# Altium PCB Faceplate_Display.PcbDoc
Units mil, origin at the board's own origin, x right, y up, seen from the top; angles counter-clockwise.
Board outline 8164 x 1503 mil, 2 copper layers (Top Layer, Bottom Layer); 31 components, 36 nets, 198 pads, 113 vias.
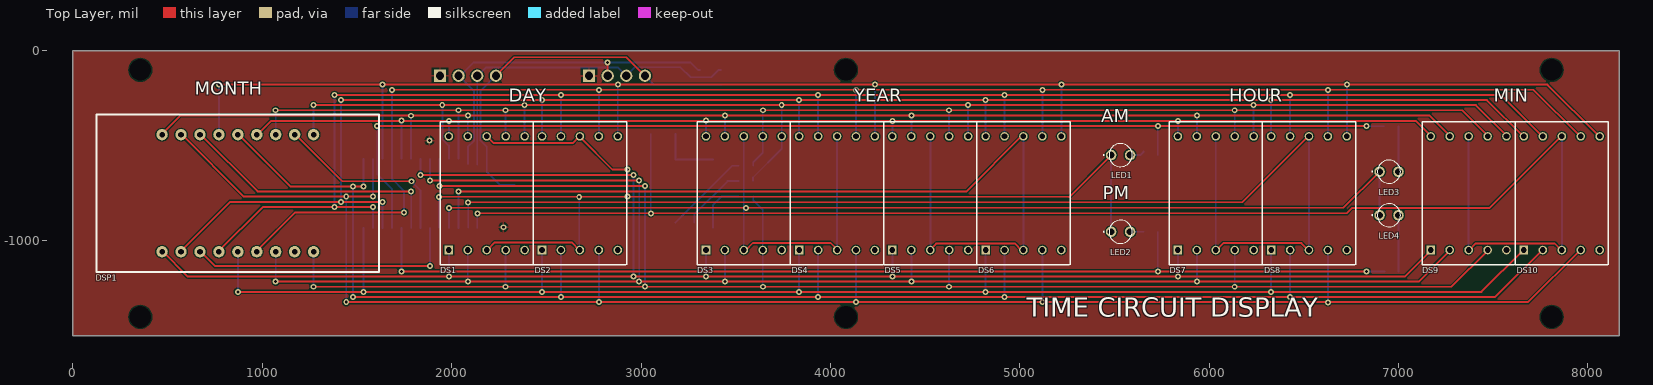
[diagram p0: Top Layer view]
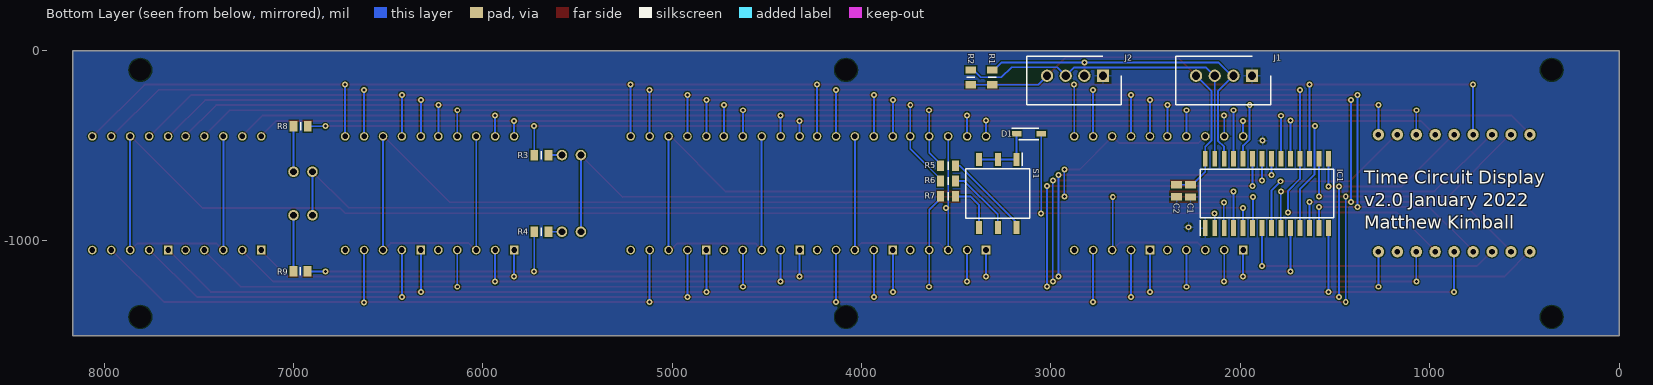
[diagram p1: Bottom Layer view, seen from below]
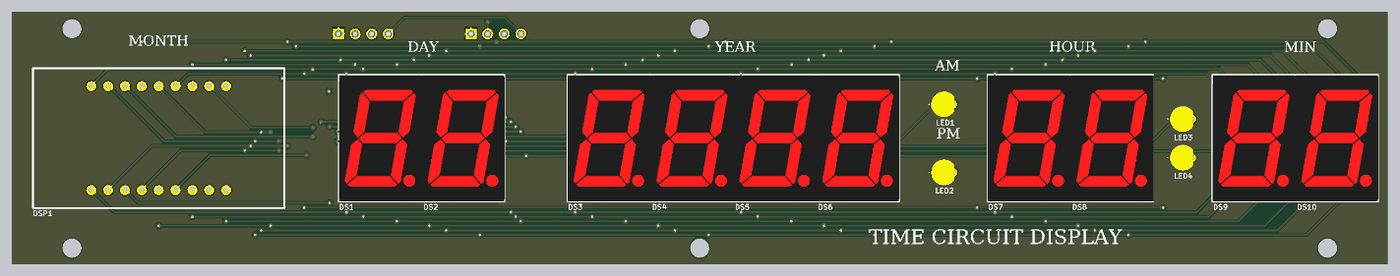
[diagram p2: 3D render of the assembled board from above, using the file's embedded part models]
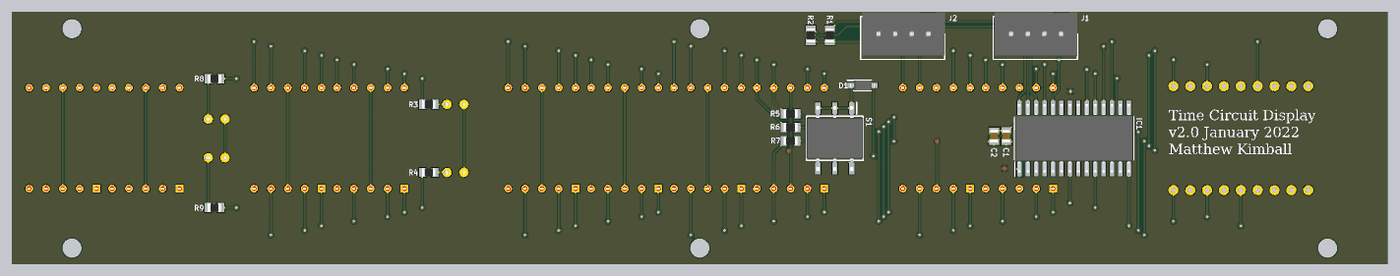
[diagram p3: 3D render of the assembled board from below, using the file's embedded part models]

## Layer stack, top to bottom
Top Solder: solder mask 0.4, Solder Resist, Dk 3.5
Top Layer: signal copper 1.4
Dielectric 1: dielectric 12.6, FR-4, Dk 4.8
Bottom Layer: signal copper 1.4
Bottom Solder: solder mask 0.4, Solder Resist, Dk 3.5

## Board outline
0,0 0,-1503 8164,-1503 8164,0

## Design rules (kind name [scope] priority, off if disabled: settings)
Clearance [All] p1: gap=6
HoleSize [All] p1: absolutevalues=TRUE maxlimit=200 minlimit=1 maxpercent=80.000 minpercent=20.000
HoleToHoleClearance [All] p1: gap=6 allowstackedmicrovias=TRUE
MinimumSolderMaskSliver [All] p1: minsoldermaskwidth=6
PolygonConnect [All] p1: connectstyle=Relief reliefconductorwidth=10 reliefentries=4 polygonreliefangle="90 Angle" airgapwidth=10
RoutingVias [All] p1: holewidth=10 width=40 viastyle="Through Hole" minholewidth=10 minwidth=40 maxholewidth=10 maxwidth=40
SilkToSilkClearance [All] p1: silktosilkclearance=6
SilkToSolderMaskClearance [IsPad] p1: minsilkscreentomaskgap=1 clearancetoexposedcopper=TRUE
SolderMaskExpansion [All] p1: expansion=4
Width [All] p1: maxlimit=10 minlimit=10 preferedwidth=10
25 further rules are at their usual default settings.

## Components (designator, comment, footprint, x,y, rotation, side; value= is the part's Value field where it differs from the comment)
C1 "10uF" CAPC2012X145N 2262.8,-738.87 r270 bottom
C2 "100nF" CAPC2012X88N 2335.63,-738.87 r270 bottom
D1 "1N4148W-E3-08" SOD3716X135N 3116.14,-437.69 r180 bottom
DS1 "LAP-601VL" DIPS1524W50P254L1225H830Q10N 2184.76,-751.08 r90 top (schematic designator DS2)
DS2 "LAP-601VL" DIPS1524W50P254L1225H830Q10N 2676.88,-751.08 r90 top (schematic designator DS4)
DS3 "LAP-601VL" DIPS1524W50P254L1225H830Q10N 3542.63,-751.08 r90 top (schematic designator DS5)
DS4 "LAP-601VL" DIPS1524W50P254L1225H830Q10N 4034.76,-751.08 r90 top (schematic designator DS6)
DS5 "LAP-601VL" DIPS1524W50P254L1225H830Q10N 4526.88,-751.08 r90 top (schematic designator DS8)
DS6 "LAP-601VL" DIPS1524W50P254L1225H830Q10N 5019.01,-751.08 r90 top (schematic designator DS10)
DS7 "LAP-601VL" DIPS1524W50P254L1225H830Q10N 6034.76,-751.08 r90 top (schematic designator DS1)
DS8 "LAP-601VL" DIPS1524W50P254L1225H830Q10N 6526.88,-751.08 r90 top (schematic designator DS3)
DS9 "LAP-601VL" DIPS1524W50P254L1225H830Q10N 7369.8,-751.08 r90 top (schematic designator DS7)
DS10 "LAP-601VL" DIPS1524W50P254L1225H830Q10N 7861.92,-751.08 r90 top (schematic designator DS9)
DSP1 "14 Segment Display" "14 Segment Display CS" 870.58,-751.08 r0 top
IC1 "HT16K33-28SOP" SOIC127P1031X264-28N 1860,-752 r90 bottom
J1 "35312-0460" SHDR4W64P0X250_1X4_1246X650X700P 1938,-131 r0 bottom
J2 "35312-0460" SHDR4W64P0X250_1X4_1246X650X700P 2725,-131 r0 bottom
LED1 "L-934LYD-18.5HSF" L934LYD185HSF 5531.95,-549.81 r0 top
LED2 "L-934LYD-18.5HSF" L934LYD185HSF 5531.95,-954.81 r0 top
LED3 "L-934LYD-18.5HSF" L934LYD185HSF 6949.45,-637.31 r0 top
LED4 "L-934LYD-18.5HSF" L934LYD185HSF 6949.45,-867.31 r0 top
R1 "4.7K" RESC2012X50N 3310,-139 r90 bottom
R2 "4.7K" RESC2012X50N 3423,-139 r90 bottom
R3 "200" RESC2012X60N 5690.94,-549.81 r0 bottom
R4 "200" RESC2012X60N 5690.94,-954.43 r0 bottom
R5 "CRCW080539K0FKEA" RESC2012X50N 3542.63,-606 r0 bottom
R6 "CRCW080539K0FKEA" RESC2012X50N 3542.63,-686.71 r0 bottom
R7 "CRCW080539K0FKEA" RESC2012X50N 3542.63,-767.42 r0 bottom
R8 "200" RESC2012X60N 6961.61,-397.34 r180 bottom
R9 "200" RESC2012X60N 6962.6,-1164 r180 bottom
S1 "A6S-3102-H" SOP254P980X380-6N 3280.51,-752 r270 bottom

## Footprints (in the part's own frame and the unit in brackets; to place one, negate y for a bottom-side part, rotate by r counter-clockwise, add the part's x,y. Pads: shape width x height; smd on the part's side, far side on the other; paste and mask are expansions set on the pad)
"14 Segment Display CS" [mil]
  round 60 hole 30: 1(-400,-309.06) 2(-300,-309.06) 3(-200,-309.06) 4(-100,-309.06) 5(0,-309.06) 6(100,-309.06) 7(200,-309.06) 8(300,-309.06) 9(400,-309.06) 10(400,309.06) 11(300,309.06) 12(200,309.06) 13(100,309.06) 14(0,309.06) 15(-100,309.06) 16(-200,309.06) 17(-300,309.06) 18(-400,309.06)
  silkscreen extent -746,-415 746,415
CAPC2012X88N [mm]
  rect 1.02x1.47 smd: 1(-0.8,0) 2(0.8,0)
  body extent -1,-0.63 1,0.63, height 0.88
CAPC2012X145N [mm]
  rect 0.99x1.47 smd: 1(-0.82,0) 2(0.82,0)
  body extent -1,-0.63 1,0.63, height 1.45
DIPS1524W50P254L1225H830Q10N [mm]
  rect 1.15x1.15 hole 0.75: 1(-7.62,5.08)
  round 1.15 hole 0.75: 2(-7.62,2.54) 3(-7.62,0) 4(-7.62,-2.54) 5(-7.62,-5.08) 6(7.62,-5.08) 7(7.62,-2.54) 8(7.62,0) 9(7.62,2.54) 10(7.62,5.08)
  silkscreen extent -9.6,-6.25 9.6,6.25, body extent -9.52,-6.28 9.48,6.22, height 8
L934LYD185HSF [mm]
  round 1.416 hole 0.91: 1(-1.27,0) 2(1.27,0)
  silkscreen extent -2.3,-0.05 -2.2,0.05, body extent -1.92,-1.92 1.52,1.93, height 5.39
RESC2012X50N [mm]
  rect 0.95x1.45 smd: 1(-1,0) 2(1,0)
  silkscreen extent 0,-0.53 0,0.53, body extent -1.02,-0.63 1.02,0.63, height 0.5
RESC2012X60N [mm]
  rect 1.05x1.4 smd: 1(-0.95,0) 2(0.95,0)
  silkscreen extent 0,-0.53 0,0.53, body extent -1,-0.63 1,0.63, height 0.6
SHDR4W64P0X250_1X4_1246X650X700P [mm]
  rect 1.65x1.65 hole 1.1: 1(0,0)
  round 1.65 hole 1.1: 2(2.5,0) 3(5,0) 4(7.5,0)
  silkscreen extent -2.48,-2.64 10.23,3.86, body extent -2.48,-3.25 9.98,3.25, height 7
SOD3716X135N [mm]
  rect 1.25x0.75 smd: 1(-1.65,0) 2(1.65,0)
  silkscreen extent -2.27,-0.77 1.35,0.77, body extent -1.85,-0.77 1.85,0.77, height 1.35
SOIC127P1031X264-28N [mm]
  rect 2.1x0.65 smd: 1(-4.65,8.255) 2(-4.65,6.985) 3(-4.65,5.715) 4(-4.65,4.445) 5(-4.65,3.175) 6(-4.65,1.905) 7(-4.65,0.635) 8(-4.65,-0.635) 9(-4.65,-1.905) 10(-4.65,-3.175) 11(-4.65,-4.445) 12(-4.65,-5.715) 13(-4.65,-6.985) 14(-4.65,-8.255) 15(4.65,-8.255) 16(4.65,-6.985) 17(4.65,-5.715) 18(4.65,-4.445) 19(4.65,-3.175) 20(4.65,-1.905) 21(4.65,-0.635) 22(4.65,0.635) 23(4.65,1.905) 24(4.65,3.175) 25(4.65,4.445) 26(4.65,5.715) 27(4.65,6.985) 28(4.65,8.255)
  silkscreen extent -5.7,-8.95 3.25,8.95, body extent -5.16,-8.95 5.16,8.95, height 2.64
SOP254P980X380-6N [mm]
  rect 1.75x0.8 smd: 1(-4.55,2.54) 2(-4.55,0) 3(-4.55,-2.54) 4(4.55,-2.54) 5(4.55,0) 6(4.55,2.54)
  silkscreen extent -5.43,-4.28 3.32,4.28, body extent -4.9,-4.28 4.9,4.28, height 3.8

## Part data
C1: library part VJ0805Y104KXAAT, "Capacitor"
C2: library part C0805C104K4RACTU, "Capacitor"
D1: "Diode"
DS1 DS2 DS3 DS4 DS5 DS6 DS7 DS8 DS9 DS10: "Display"
IC1: "Integrated Circuit"
J1 J2: "Connector"
LED1 LED2 LED3 LED4: "LED"
R1 R2: library part CRCW08054K70FKEAHP, "Resistor"
R3 R4 R8 R9: library part ERA-6AEB201V, "Resistor"
R5 R6 R7: "Resistor"
S1: "Switch"

## Free pads (board coordinates)
  round 0 hole 114.17 unplated: 1(355.55,-1404.57) 1(355.57,-100.11) 1(4081.93,-1404.57) 1(4081.95,-100.11) 1(7808.31,-1404.57) 1(7808.33,-100.11)

## Via types
v1: diameter 31.5, hole 15.75, Top Layer to Bottom Layer, tented both sides, 113 vias

## Nets (pads, with @x,y where several pads share a name; then routed paths per layer and width w, separated by ;. In a path a pad name is that pad's centre, name@x,y a point inside that pad or via, vN(x,y) a via of type N, cw(c..) or ccw(c..) an arc to the next point about the centre after c; other vN are vias at no path point)
COM0: D1.2 DS9.3 DS9.8 DS10.3 DS10.8 IC1.2 | length 8103.2
  Top Layer w10: v1(2135,-857) 6726,-857 6754.56,-828.44 7481,-828.44 DS10.8@7858.37,-451.08 ; DS9.3@7373.13,-1051.08 7408.21,-1016 7823.29,-1016 DS10.3@7858.37,-1051.08
  Bottom Layer w10: IC1.2 v1(2135,-857) ; v1(3051.18,-857) D1.2 ; DS9.3@7370.13,-1052.08 DS9.8@7370.13,-452.08 ; DS10.3@7862.37,-1051.08 DS10.8@7862.37,-451.08
COM1: DS7.3 DS7.8 DS8.3 DS8.8 IC1.3 | length 6433.6
  Top Layer w10: v1@2085,-799 v1(2087,-799) 6175.41,-799 DS8.8@6523.33,-451.08 ; DS7.3@6038.09,-1051.08 6074.17,-1015 6487.25,-1015 DS8.3@6523.33,-1051.08
  Bottom Layer w10: IC1.3@2087,-933.07 v1@2087,-797 ; DS7.3 DS7.8 ; DS8.3 DS8.8
COM2: DS5.3 DS5.8 DS6.3 DS6.8 IC1.4 | length 5001.2
  Top Layer w10: v1(2035,-741) 4718.64,-741 DS6.8@5008.56,-451.08 ; DS5.3@4523.33,-1051.08 4557.41,-1017 4974.48,-1017 DS6.3@5008.56,-1051.08
  Bottom Layer w10: IC1.4 v1(2035,-741) ; DS5.3@4527.33,-1050.08 DS5.8@4527.33,-450.08 ; DS6.3@5019.56,-1050.08 DS6.8@5019.56,-450.08
COM3: DS3.3 DS3.8 DS4.3 DS4.8 IC1.5 LED3.1 LED4.1 | length 7049.5
  Top Layer w10: v1@1986,-828 6708.76,-828 LED3.1 ; DS3.3@3552.85,-1051.08 3589.93,-1014 4001.01,-1014 DS4.3@4038.09,-1051.08
  Bottom Layer w10: IC1.5 v1@1985,-824 ; DS3.3@3541.85,-1051.08 DS3.8@3541.85,-451.08 ; DS4.3@4034.85,-1049.08 DS4.8@4034.85,-449.08 ; LED4.1 LED3.1
  other v1: 1985,-828 3552.85,-828
COM4: DS1.3 DS1.8 DS2.3 DS2.8 IC1.6 LED1.1 LED2.1 | length 5994.1
  Top Layer w10: v1(1933,-770) v1(2673.33,-770) 5259.76,-770 ; DS1.3@2188.09,-1051.08 2228.17,-1011 2633.25,-1011 DS2.3@2673.33,-1051.08 ; DS1.8@2188.09,-451.08 2223.01,-486 2638.41,-486 2673.33,-451.08 2848.95,-626.7 v1(2929.28,-626.7) ; 5259.76,-772 LED1.1
  Bottom Layer w10: IC1.6@1933,-933.07 v1(1933,-770) ; DS2.3@2673.33,-1051.08 v1(2673.33,-770) ; v1(2929.28,-769.39) v1(2929.28,-626.7) ; LED2.1@5480.95,-955.81 LED1.1@5480.95,-550.81
COM5: DSP1.3 IC1.7 | length 1448.5
  Top Layer w10: DSP1.3@670.58,-1055.9 750.68,-1136 v1(1885,-1136)
  Bottom Layer w10: v1(1885,-1136) IC1.7
COM6: DSP1.11 IC1.8 | length 987
  Top Layer w10: DSP1.11@1170.58,-437.79 1420.79,-688 v1(1787,-688)
  Bottom Layer w10: v1(1787,-688) 1835,-736 IC1.8
COM7: DSP1.16 IC1.9 | length 1433.6
  Top Layer w10: DSP1.16@670.58,-437.79 974.6,-741.81 v1(1786,-741.81)
  Bottom Layer w10: IC1.9@1786,-934.07 v1(1786,-741.81)
GND: C1.2 C2.2 IC1.1 J1.1 J2.1
  other v1: 2272.64,-930.8 1881.89,-473.13
NetC1_1: C1.1 C2.1 IC1.28 J1.4 J2.4 R1.1 R2.1 | length 2018.9
  Top Layer w10: J1.4 2331.02,-33.25 2922.53,-33.25 J2.4
  Bottom Layer w10: J1.4@2232,-132 2151.12,-212.88 2151.12,-471.12 2185,-505 IC1.28 2185,-637.46 2254.13,-706.59 C1.1 C2.1@2331.91,-706.59 ; J2.4 3067.65,-178.37 R1.1 R2.1
NetD1_1: D1.1 S1.1 S1.2 S1.3 | length 334.8
  Bottom Layer w10: S1.1 S1.2 S1.3 ; S1.1@3181.1,-572.54 D1.1
NetIC1_26: IC1.26 J1.2 J2.2 R1.2 | length 1933
  Top Layer w10: J2.2 v1(2823.43,-60)
  Bottom Layer w10: IC1.26@2085,-597.5 IC1.26 2085,-507 2118.39,-473.61 2118.39,-213.39 2020.91,-115.91 2061.09,-115.91 2117,-60 v1@2821,-60 ; v1(2823.43,-60) 3260,-60 3299.63,-99.63 R1.2
NetIC1_27: IC1.27 J1.3 J2.3 R2.2 | length 1849.4
  Bottom Layer w10: IC1.27@2135,-599.27 IC1.27 2135,-132 2179.48,-87.52 2251.29,-87.52 2251.77,-88 2687.48,-88 2687.96,-87.52 2762.04,-87.52 2762.52,-88 2804.93,-88 2805.42,-87.52 2878.37,-87.52 J2.3 2966.85,-86 3208,-86 3261,-139 3371,-139 3410.37,-99.63 R2.2
NetLED1_2: LED1.2 R3.1 | length 80.6
  Bottom Layer w10: LED1.2@5580.71,-549.9 LED1.2@5582.03,-549.9 ; LED1.2 5634.93,-549.81 R3.1@5653.54,-531.2
NetLED2_2: LED2.2 R4.1 | length 71.2
  Bottom Layer w10: LED2.2 R4.1@5653.15,-954.81
NetLED3_2: LED3.2 R8.1 | length 239.5
  Bottom Layer w10: LED3.2@6999.02,-636.88 R8.1
NetLED4_2: LED4.2 R9.1 | length 296.7
  Bottom Layer w10: R9.1@6999.45,-1164 LED4.2
NetR5_1: R5.1 S1.6 | length 457.7
  Bottom Layer w10: S1.6@3180.51,-907.18 3481.69,-606 R5.1@3513.48,-606
NetR6_1: R6.1 S1.5 | length 350.2
  Bottom Layer w10: S1.5@3280.51,-907.18 3280.51,-862.89 3456.69,-686.71 R6.1@3513.48,-686.71
NetR7_1: R7.1 S1.4 | length 270.5
  Bottom Layer w10: S1.4 3380.51,-812.1 3425.2,-767.42 R7.1@3513.48,-767.42
ROW0: DS1.7 DS3.7 DS5.7 DS7.7 DS9.7 DSP1.12 IC1.25 R5.2 | length 7568.6
  Top Layer w10: v1(1070.58,-313) v1(2035,-313) v1(2284.76,-313) v1(3642.63,-313) v1(4626.88,-313) v1(6134.76,-313) 7335.05,-313 DS9.7@7473.13,-451.08
  Bottom Layer w10: DSP1.12@1070.58,-437.79 v1(1070.58,-313) ; IC1.25 v1(2035,-313) ; DS1.7 v1(2284.76,-313) ; R5.2@3592.22,-606 3592.22,-586.78 3642.63,-536.37 DS3.7 v1(3642.63,-313) ; DS5.7 v1(4626.88,-313) ; DS7.7 v1(6134.76,-313)
ROW1: DS1.6 DS3.6 DS5.6 DS7.6 DS9.6 DSP1.10 IC1.24 R6.2 | length 7777.2
  Top Layer w10: v1(1270.58,-286) v1(2384.76,-286) v1(3742.63,-286) v1(4726.88,-286) v1(6234.76,-286) 7408.05,-286 DS9.6@7573.13,-451.08
  Bottom Layer w10: DSP1.10@1270.58,-437.79 v1(1270.58,-286) ; v1@1950.79,-286.12 1950.79,-465.25 1985,-499.46 IC1.24 ; DS1.6 v1(2384.76,-286) ; R6.2@3590.9,-685.38 3590.9,-668.1 3742.63,-516.37 v1(3742.63,-286) ; DS5.6 v1(4726.88,-286) ; DS7.6 v1(6234.76,-286)
  other v1: 1950,-286.12
ROW2: DS1.4 DS3.4 DS5.4 DS7.4 DS9.4 DSP1.9 IC1.23 R7.2 | length 9321
  Top Layer w10: v1@1263,-1245 v1(1270.58,-1245) v1(2284.76,-1245) v1(3642.63,-1245) v1(4626.88,-1245) v1(6134.76,-1245) 7279.21,-1245 DS9.4@7473.13,-1051.08 ; v1@1935,-712 v1@3019.69,-712
  Bottom Layer w10: v1(1270.58,-1245) DSP1.9@1270.58,-1055.9 ; v1(1935,-713) IC1.23 ; v1(2284.76,-1245) DS1.4 ; v1(3019.69,-1244.78) v1(3019.69,-712.3) ; R7.2@3592.22,-767.42 3592.22,-789.22 3642.63,-839.63 DS3.4 v1(3642.63,-1245) ; v1(4626.88,-1245) DS5.4 ; v1(6134.76,-1245) DS7.4
ROW3: DS1.2 DS3.2 DS5.2 DS7.2 DS9.2 DSP1.7 IC1.22 | length 8855.5
  Top Layer w10: v1(1070.58,-1218) v1(2084.76,-1218) v1(2990,-1218) v1(3442.63,-1218) v1(4426.88,-1218) v1(5934.76,-1218) 7106.21,-1218 DS9.2@7273.13,-1051.08 ; v1(1885,-683) v1(2990,-683)
  Bottom Layer w10: v1(1070.58,-1218) DSP1.7@1070.58,-1055.9 ; v1(1885,-683) IC1.22 ; v1(2084.76,-1218) DS1.2 ; v1(2990,-1218) v1(2990,-683) ; v1(3442.63,-1218) DS3.2 ; v1(4426.88,-1218) DS5.2 ; v1(5934.76,-1218) DS7.2
ROW4: DS1.1 DS3.1 DS5.1 DS7.1 DS9.1 DSP1.1 IC1.21 | length 9123.8
  Top Layer w10: DSP1.1@470.58,-1055.9 605.68,-1191 v1(1984.76,-1191) v1(2960.63,-1191) v1(3342.63,-1191) v1(4326.88,-1191) v1(5834.76,-1191) 7033.21,-1191 DS9.1@7173.13,-1051.08 ; v1(1835,-654) v1(2960.63,-654)
  Bottom Layer w10: v1(1835,-654) IC1.21 ; v1(1984.76,-1191) DS1.1 ; v1(2960.63,-1191) v1(2960.63,-654) ; v1(3342.63,-1191) DS3.1 ; v1(4326.88,-1191) DS5.1 ; v1(5834.76,-1191) DS7.1
ROW5: DS1.9 DS3.9 DS5.9 DS7.9 DS9.9 DSP1.18 IC1.20 | length 7560.3
  Top Layer w10: DSP1.18@470.58,-437.79 568.37,-340 v1(2084.76,-340) v1(3442.63,-340) v1(4426.88,-340) v1(5934.76,-340) 7162.05,-340 DS9.9@7273.13,-451.08
  Bottom Layer w10: IC1.20 v1(1785,-342) ; DS1.9 v1(2084.76,-340) ; DS3.9 v1(3442.63,-340) ; DS5.9 v1(4426.88,-340) ; DS7.9 v1(5934.76,-340)
ROW6: DS1.10 DS3.10 DS5.10 DS7.10 DS9.10 DSP1.13 IC1.19 | length 6794.3
  Top Layer w10: DSP1.13@973.9,-441.1 1046,-369 v1(1984.76,-369) v1(4326.88,-369) v1(5834.76,-369) 7091.05,-369 DS9.10@7173.13,-451.08
  Bottom Layer w10: IC1.19 v1(1735,-367) ; DS1.10 v1(1984.76,-369) ; DS3.10 v1(3342.63,-368) ; DS5.10 v1(4326.88,-369) ; DS7.10 v1(5834.76,-369)
ROW7: DS2.7 DS4.7 DS6.7 DS8.7 DS10.7 DSP1.6 IC1.18 | length 8896
  Top Layer w10: DSP1.6@970.58,-1055.9 1174.48,-852 v1(1749,-852) ; v1(1685,-205) v1(2776.88,-205) v1(4134.76,-205) v1(5119.01,-205) v1(6626.88,-205) 7712.29,-205 DS10.7@7958.37,-451.08
  Bottom Layer w10: v1(1685,-205) IC1.18 1685,-676 1749,-740 v1(1749,-852) ; DS2.7 v1(2776.88,-205) ; DS4.7 v1(4134.76,-205) ; DS6.7 v1(5119.01,-205) ; DS8.7 v1(6626.88,-205)
ROW8: DS2.6 DS4.6 DS6.6 DS8.6 DS10.6 DSP1.15 IC1.17 | length 9144.9
  Top Layer w10: v1(770.58,-178) v1(1635,-178) v1(2876.88,-178) v1(4234.76,-178) v1(6726.88,-178) 7785.29,-178 DS10.6@8058.37,-451.08
  Bottom Layer w10: DSP1.15@770.58,-437.79 v1(770.58,-178) ; IC1.17 v1(1635,-178) ; DS2.6 v1(2876.88,-178) ; DS4.6 v1(4234.76,-178) ; DS6.6 v1(5219.01,-177) ; DS8.6 v1(6726.88,-178)
ROW9: DS2.4 DS4.4 DS6.4 DS8.4 DS10.4 DSP1.17 IC1.16 | length 9641.1
  Top Layer w10: DSP1.17@570.58,-437.79 901.79,-769 v1(1443,-769) v1(1585,-769) ; v1(1443,-1326.56) v1(2776.88,-1326.56) v1(4134.76,-1326.56) v1(5119.01,-1326.56) 7682.88,-1326.56 DS10.4@7958.37,-1051.08
  Bottom Layer w10: v1(1443,-1326.56) v1(1443,-769) ; v1(1585,-769) IC1.16 ; v1(2776.88,-1326.56) DS2.4 ; v1(4134.76,-1326.56) DS4.4 ; v1(5119.01,-1326.56) DS6.4 ; v1(6626.88,-1327) DS8.4
ROW10: DS2.2 DS4.2 DS6.2 DS8.2 DS10.2 DSP1.14 IC1.15 | length 8883.1
  Top Layer w10: DSP1.14@870.58,-437.79 1147.79,-715 v1(1479,-715) v1(1535,-715) ; v1(1479,-1299) v1(2576.88,-1299) v1(3934.76,-1299) v1(4919.01,-1299) v1(6426.88,-1299) 7510.45,-1299 DS10.2@7758.37,-1051.08
  Bottom Layer w10: v1(1479,-1299) v1(1479,-715) ; v1(1535,-715) IC1.15 ; v1(2576.88,-1299) DS2.2 ; v1(3934.76,-1299) DS4.2 ; v1(4919.01,-1299) DS6.2 ; v1(6426.88,-1299) DS8.2
ROW11: DS2.1 DS4.1 DS6.1 DS8.1 DS10.1 DSP1.5 IC1.14 | length 8316
  Top Layer w10: v1(870.58,-1272) v1(1535,-1272) v1(2476.88,-1272) v1(3834.76,-1272) v1(4819.01,-1272) v1(6326.88,-1272) 7437.45,-1272 DS10.1@7658.37,-1051.08
  Bottom Layer w10: v1(870.58,-1272) DSP1.5@870.58,-1055.9 ; v1(1535,-1272) IC1.14 ; v1(2476.88,-1272) DS2.1 ; v1(3834.76,-1272) DS4.1 ; v1(4819.01,-1272) DS6.1 ; v1(6326.88,-1272) DS8.1
ROW12: DS2.9 DS4.9 DS6.9 DS8.9 DS10.9 DSP1.4 IC1.13 | length 8958.8
  Top Layer w10: DSP1.4@770.58,-1055.9 1002.48,-824 v1(1381,-824) v1(1585,-824) ; v1(1381,-232) v1(2576.88,-232) v1(3934.76,-232) v1(4919.01,-232) v1(6426.88,-232) 7539.29,-232 DS10.9@7758.37,-451.08
  Bottom Layer w10: v1(1381,-232) 1381,-822 v1@1383,-824 ; IC1.13 v1(1585,-824) ; DS2.9 v1(2576.88,-232) ; DS4.9 v1(3934.76,-232) ; DS6.9 v1(4919.01,-232) ; DS8.9 v1(6426.88,-232)
ROW13: DS2.10 DS4.10 DS6.10 DS8.10 DS10.10 DSP1.2 IC1.12 | length 8942.1
  Top Layer w10: DSP1.2@570.58,-1055.9 829.48,-797 v1(1635,-797) ; v1(1416,-259) 2463.33,-259 2468.33,-254 2473.33,-259 v1(2476.88,-259) v1(3834.76,-259) v1(4819.01,-259) v1(6326.88,-259) 7466.29,-259 DS10.10@7658.37,-451.08
  Bottom Layer w10: v1(1416,-797) v1(1416,-259) ; IC1.12 v1(1635,-797) ; DS2.10 v1(2476.88,-259) ; DS4.10 v1(3834.76,-259) ; DS6.10 v1(4819.01,-259) ; DS8.10 v1(6326.88,-259)
ROW14: IC1.11 R3.2 R8.2 | length 6044
  Top Layer w10: v1(1605.32,-395.75) v1@6831.69,-395.75
  Bottom Layer w10: v1(1605.32,-395.75) 1608.8,-399.23 1608.8,-653.77 1685,-729.98 IC1.11 ; R3.2 v1(5728.35,-397) ; v1(6831.69,-397.34) R8.2
ROW15: IC1.10 R4.2 R9.2 | length 5628.7
  Top Layer w10: v1(1735,-1164) v1(5728.35,-1164) v1@6831.69,-1164
  Bottom Layer w10: v1(1735,-1164) IC1.10 ; v1(5728.35,-1164) R4.2 ; v1(6831.69,-1164.07) R9.2@6925.2,-1164.07
pads on no net: DS1.5 DS2.5 DS3.5 DS4.5 DS5.5 DS6.5 DS7.5 DS8.5 DS9.5 DS10.5 DSP1.8

## Polygon pours and split planes (outlines as drawn)
GND on Top Layer "Top Layer-No Net" (solid, remove dead copper, pour order 4): 8164,0 0,0 0,-1503 8164,-1503
GND on Bottom Layer "Top Layer-No Net" (solid, remove dead copper, pour order 6): 8164,-1503 8164,0 0,0 0,-1503

## Silkscreen, mask and mechanical layers (free items; w line width, h text height)
Top Overlay:
  circle w3.94: c6949.45,-867.31 r61.02
  circle w3.94: c6949.45,-637.31 r61.02
  circle w3.94: c5531.95,-954.81 r61.02
  circle w3.94: c5531.95,-549.81 r61.02
  text "MONTH" at 643,-256 h120
  text "DAY" at 2300,-291 h120
  text "YEAR" at 4125,-291 h120
  text "HOUR" at 6107,-291 h120
  text "MIN" at 7502,-292 h120
  text "AM" at 5431,-401 h120
  text "PM" at 5439,-806 h120
  text "TIME CIRCUIT DISPLAY" at 5037,-1437 h170
Bottom Overlay:
  text "Time Circuit Display  / v2.0 January 2022 / Matthew Kimball" at 1346.46,-963.66 h120
Mechanical 1:
  lines w10: 8164,-0.69 8164,-1503.32 0,-1503.32 0,0 8164,0